# Altium PCB PCB1.PcbDoc
Units mm, origin at the board's own origin, x right, y up, seen from the top; angles counter-clockwise.
Board outline 90 x 79 mm, 2 copper layers (Top Layer, Bottom Layer); 37 components, 0 nets, 114 pads, 0 vias.
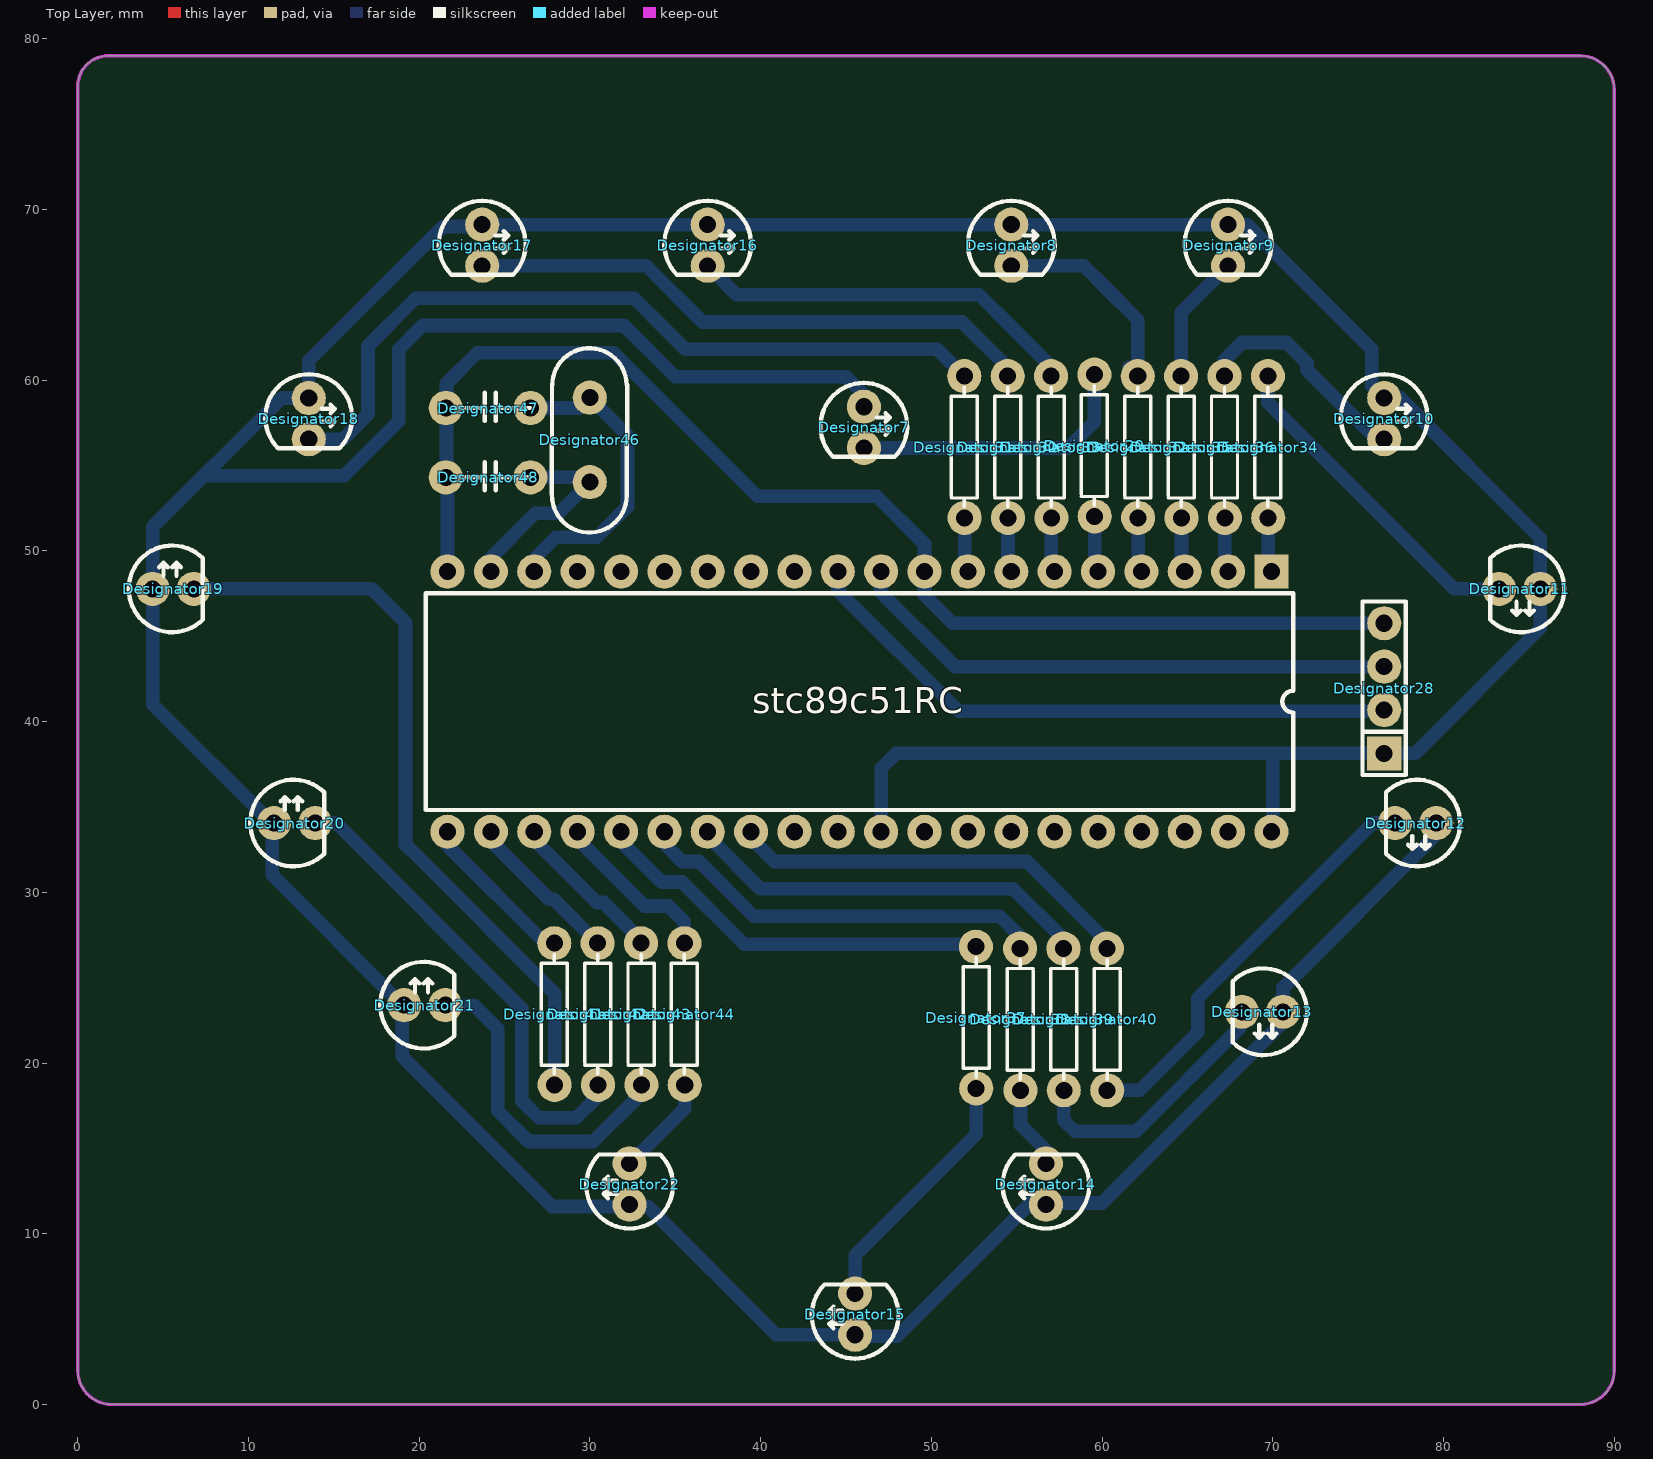
[diagram p0: Top Layer view]
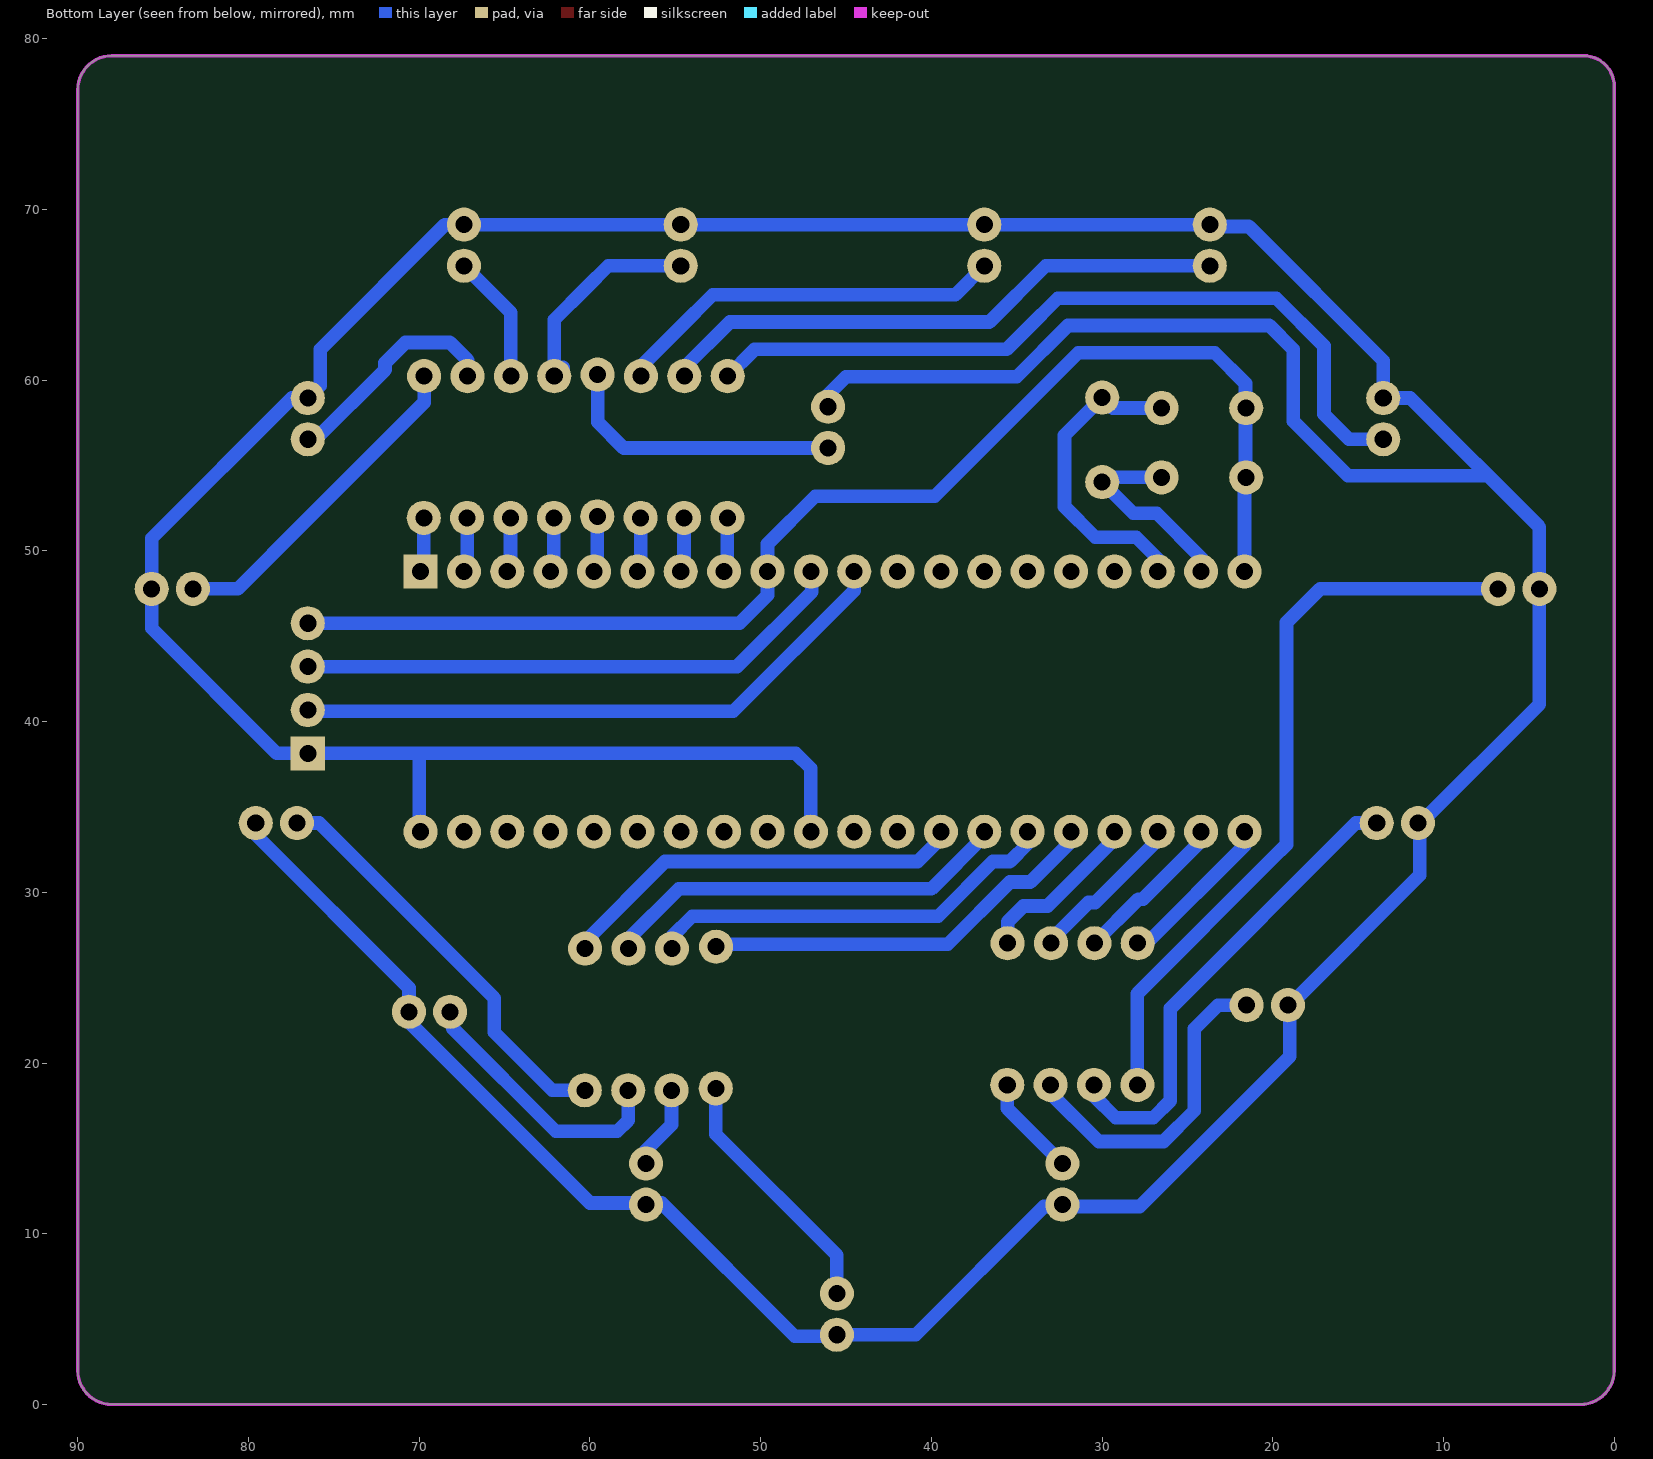
[diagram p1: Bottom Layer view, seen from below]

## Layer stack, top to bottom
Top Solder: solder mask 0.0102, Solder Resist, Dk 3.5
Top Layer: signal copper 0.0356
Dielectric1: dielectric 0.32, FR-4, Dk 4.8
Bottom Layer: signal copper 0.0356
Bottom Solder: solder mask 0.0102, Solder Resist, Dk 3.5

## Board outline
0,2 ccw(c2,2) 2,0 88,0 ccw(c88,2) 90,2 90,77 ccw(c88,77) 88,79 1.8,79 ccw(c1.8,77.2) 0,77.2

## Design rules (kind name [scope] priority, off if disabled: settings)
Clearance [All] p1: gap=0.254 ignorepadtopadclearanceinfootprint=FALSE except(0: Arc-Hole Track-Hole SMDPad-Hole THPad-Hole Via-Hole Fill-Hole Poly-Hole Region-Hole Text-Hole)
PolygonConnect [All] p1: connectstyle=Relief reliefconductorwidth=0.254 reliefentries=4 polygonreliefangle="90 Angle" airgapwidth=0.254
RoutingVias [All] p1: holewidth=0.711 width=1.27 viastyle="Through Hole" minholewidth=0.711 minwidth=1.27 maxholewidth=0.711 maxwidth=1.27
SilkToSolderMaskClearance SilkscreenOverComponentPads [IsPad] p1: minsilkscreentomaskgap=0.254 clearancetoexposedcopper=TRUE
SolderMaskExpansion [All] p1: expansion=0.102 istentingtop=FALSE
Width [All] p1: maxlimit=0.254 minlimit=0.254 preferedwidth=0.254
29 further rules are at their usual default settings.

## Components (designator, comment, footprint, x,y, rotation, side; value= is the part's Value field where it differs from the comment)
Designator7 "Comment" LED 46.044,58.44 r270 top
Designator8 "Comment" LED 54.68,69.108 r270 top
Designator9 "Comment" LED 67.38,69.108 r270 top
Designator10 "Comment" LED 76.524,58.948 r270 top
Designator11 "Comment" LED 85.668,47.772 r180 top
Designator12 "Comment" LED 79.572,34.056 r180 top
Designator13 "Comment" LED 70.6,23 r180 top
Designator14 "Comment" LED 56.712,11.704 r90 top
Designator15 "Comment" LED 45.536,4.084 r90 top
Designator16 "Comment" LED 36.9,69.108 r270 top
Designator17 "Comment" LED 23.692,69.108 r270 top
Designator18 "Comment" LED 13.532,58.948 r270 top
Designator19 "Comment" LED 4.388,47.772 r0 top
Designator20 "Comment" LED 11.5,34.056 r0 top
Designator21 "Comment" LED 19.12,23.388 r0 top
Designator22 "Comment" LED 32.328,11.704 r90 top
Designator28 "Comment" SIP4 76.524,38.138 r90 top
Designator29 "Comment" 电阻 59.756,55.988 r90 top
Designator30 "Comment" 电阻 54.68,55.9 r90 top
Designator31 "Comment" 电阻 52.14,55.9 r90 top
Designator32 "Comment" 电阻 62.3,55.9 r90 top
Designator33 "Comment" 电阻 57.22,55.9 r90 top
Designator34 "Comment" 电阻 69.92,55.9 r90 top
Designator35 "Comment" 电阻 64.84,55.9 r90 top
Designator36 "Comment" 电阻 67.38,55.9 r90 top
Designator37 "Comment" 电阻 52.416,22.844 r270 top
Designator38 "Comment" 电阻 55.008,22.732 r270 top
Designator39 "Comment" 电阻 57.548,22.732 r270 top
Designator40 "Comment" 电阻 60.088,22.732 r270 top
Designator41 "Comment" 电阻 28.124,22.688 r90 top
Designator42 "Comment" 电阻 30.664,22.688 r90 top
Designator43 "Comment" 电阻 33.204,22.688 r90 top
Designator44 "Comment" 电阻 35.744,22.688 r90 top
Designator46 "Comment" 晶振 29.788,56.408 r90 top
Designator47 "Comment" 陶瓷电容 24.2,58.44 r0 top
Designator48 "Comment" 陶瓷电容 24.2,54.376 r0 top
stc89c51RC "Comment" dip40 69.92,48.788 r270 top

## Footprints (in the part's own frame and the unit in brackets; to place one, negate y for a bottom-side part, rotate by r counter-clockwise, add the part's x,y. Pads: shape width x height; smd on the part's side, far side on the other; paste and mask are expansions set on the pad)
dip40 [mm]
  rect 2x2 hole 1: 1(0,0)
  round 2 hole 1: 2(0,-2.54) 3(0,-5.08) 4(0,-7.62) 5(0,-10.16) 6(0,-12.7) 7(0,-15.24) 8(0,-17.78) 9(0,-20.32) 10(0,-22.86) 11(0,-25.4) 12(0,-27.94) 13(0,-30.48) 14(0,-33.02) 15(0,-35.56) 16(0,-38.1) 17(0,-40.64) 18(0,-43.18) 19(0,-45.72) 20(0,-48.26) 21(15.24,-48.26) 22(15.24,-45.72) 23(15.24,-43.18) 24(15.24,-40.64) 25(15.24,-38.1) 26(15.24,-35.56) 27(15.24,-33.02) 28(15.24,-30.48) 29(15.24,-27.94) 30(15.24,-25.4) 31(15.24,-22.86) 32(15.24,-20.32) 33(15.24,-17.78) 34(15.24,-15.24) 35(15.24,-12.7) 36(15.24,-10.16) 37(15.24,-7.62) 38(15.24,-5.08) 39(15.24,-2.54) 40(15.24,0)
  silkscreen extent 1.27,-49.53 13.97,1.27
LED [mm]
  round 2 hole 1: 1(0,0) 2(2.413,0)
  silkscreen extent -1.4,-2.54 2.94,2.54
SIP4 [mm]
  rect 2x2 hole 1: 1(0,0)
  round 2 hole 1: 2(2.54,0) 3(5.08,0) 4(7.62,0)
  silkscreen extent -1.27,-1.27 8.89,1.27
晶振 [mm]
  round 2 hole 1: 1(2.567,-0.205) 2(-2.386,-0.205)
  silkscreen extent -5.34,-2.39 5.46,2.03
电阻 [mm]
  round 2 hole 1: 1(4.33,0.21) 2(-3.97,0.19)
  silkscreen extent -3.31,-0.55 3.67,0.97
陶瓷电容 [mm]
  round 2 hole 1: 1(-2.64,-0.075) 2(2.313,-0.075)
  silkscreen extent -2,-0.84 2.31,0.81

## Nets (pads, with @x,y where several pads share a name; then routed paths per layer and width w, separated by ;. In a path a pad name is that pad's centre, name@x,y a point inside that pad or via, vN(x,y) a via of type N, cw(c..) or ccw(c..) an arc to the next point about the centre after c; other vN are vias at no path point)
pads on no net: Designator7.1 Designator7.2 Designator8.1 Designator8.2 Designator9.1 Designator9.2 Designator10.1 Designator10.2 Designator11.1 Designator11.2 Designator12.1 Designator12.2 Designator13.1 Designator13.2 Designator14.1 Designator14.2 Designator15.1 Designator15.2 Designator16.1 Designator16.2 Designator17.1 Designator17.2 Designator18.1 Designator18.2 Designator19.1 Designator19.2 Designator20.1 Designator20.2 Designator21.1 Designator21.2 Designator22.1 Designator22.2 Designator28.1 Designator28.2 Designator28.3 Designator28.4 Designator29.1 Designator29.2 Designator30.1 Designator30.2 Designator31.1 Designator31.2 Designator32.1 Designator32.2 Designator33.1 Designator33.2 Designator34.1 Designator34.2 Designator35.1 Designator35.2 Designator36.1 Designator36.2 Designator37.1 Designator37.2 Designator38.1 Designator38.2 Designator39.1 Designator39.2 Designator40.1 Designator40.2 Designator41.1 Designator41.2 Designator42.1 Designator42.2 Designator43.1 Designator43.2 Designator44.1 Designator44.2 Designator46.1 Designator46.2 Designator47.1 Designator47.2 Designator48.1 Designator48.2 stc89c51RC.1 stc89c51RC.2 stc89c51RC.3 stc89c51RC.4 stc89c51RC.5 stc89c51RC.6 stc89c51RC.7 stc89c51RC.8 stc89c51RC.9 stc89c51RC.10 stc89c51RC.11 stc89c51RC.12 stc89c51RC.13 stc89c51RC.14 stc89c51RC.15 stc89c51RC.16 stc89c51RC.17 stc89c51RC.18 stc89c51RC.19 stc89c51RC.20 stc89c51RC.21 stc89c51RC.22 stc89c51RC.23 stc89c51RC.24 stc89c51RC.25 stc89c51RC.26 stc89c51RC.27 stc89c51RC.28 stc89c51RC.29 stc89c51RC.30 stc89c51RC.31 stc89c51RC.32 stc89c51RC.33 stc89c51RC.34 stc89c51RC.35 stc89c51RC.36 stc89c51RC.37 stc89c51RC.38 stc89c51RC.39 stc89c51RC.40
copper on no net: | length 980.7
  Bottom Layer w0.8: 6.801,47.772 17.228,47.772 19.2,45.8 19.2,32.8 20,32 27.934,24.066 27.934,18.718 ; 7.441,54.4 15.6,54.4 18.8,57.6 18.8,61.8 20.2,63.2 32,63.2 35,60.2 45,60.2 46.044,59.156 46.044,58.44 ; 13.532,56.535 15.535,56.535 17,58 17,62 19.8,64.8 32.6,64.8 34.4,63 35.6,61.8 38.2,61.8 45.8,61.8 50.36,61.8 51.93,60.23 ; 13.913,34.056 15.144,34.056 26,23.2 26,17.8 27,16.8 29.2,16.8 30.474,18.074 30.474,18.718 ; 21.533,23.388 23.212,23.388 23.72,22.88 24.6,22 24.6,17.2 26.4,15.4 29.696,15.4 30.2,15.4 33.014,18.214 33.014,18.718 ; 21.6,53.917 21.6,57.473 21.6,59.8 23.4,61.6 31.4,61.6 34.36,58.64 39.8,53.2 46.8,53.2 49.6,50.4 49.6,48.788 49.6,47.4 51.242,45.758 76.524,45.758 ; 21.66,33.548 21.66,32.74 27.382,27.018 ; 21.66,48.788 21.66,53.857 ; 23.692,66.695 33.305,66.695 36.6,63.4 51.8,63.4 54.47,60.73 54.47,60.23 ; 24.2,33.548 24.2,33 27.6,29.6 27.872,29.6 30.454,27.018 ; 24.2,48.788 24.2,49.6 26.8,52.2 28.171,52.2 29.993,54.022 ; 26.513,54.301 29.714,54.301 ; 26.513,58.365 29.383,58.365 29.993,58.975 32.2,56.768 32.2,52.6 30.4,50.8 28,50.8 26.74,49.54 26.74,48.788 ; 26.74,33.548 26.74,33.06 30.4,29.4 30.8,29.4 33,27.2 ; 29.28,33.548 29.28,33.12 33.2,29.2 34.6,29.2 35.534,28.266 35.534,27.018 ; 31.82,33.548 31.82,32.98 34.2,30.6 35.4,30.6 39.038,26.962 52.458,26.962 ; 32.328,14.117 35.554,17.343 35.554,18.718 ; 34.36,33.548 34.36,32.84 35.4,31.8 36.4,31.8 39.6,28.6 54,28.6 55.198,27.402 55.198,26.702 ; 36.9,33.548 36.9,33.3 40,30.2 54.8,30.2 57.738,27.262 57.738,26.702 ; 36.9,66.695 38.595,65 52.8,65 54.75,63.05 57.01,60.79 57.01,60.23 ; 39.44,33.548 39.44,33.16 40.8,31.8 55.6,31.8 60.278,27.122 60.278,26.702 ; 44.52,48.788 44.52,47.68 51.6,40.6 76.4,40.6 ; 45.536,6.497 45.536,8.736 52.626,15.826 52.626,18.514 ; 46.044,56.027 58.027,56.027 59.546,57.546 59.546,60.318 ; 47,48.6 47,47.6 51.382,43.218 76.524,43.218 ; 47.06,33.548 47.06,37.26 47.938,38.138 70.138,38.138 78.338,38.138 85.668,45.468 85.668,50.732 77.452,58.948 76.524,58.948 75.8,59.672 75.8,61.8 68.492,69.108 54.68,69.108 23.692,69.108 23.584,69 21.4,69 13.532,61.132 13.532,58.948 11.948,58.948 4.388,51.388 4.388,50.988 4.388,47.772 4.388,41.012 11.4,34 11.4,31 19,23.4 19,20.4 27.8,11.6 29.6,11.6 33.4,11.6 40.92,4.08 45.532,4.08 45.612,4 48,4 55.8,11.8 59.4,11.8 60,11.8 70.6,22.4 70.6,23 70.6,24.4 79.6,33.4 ; 51.95,48.978 51.95,51.93 ; 54.49,48.978 54.49,51.93 ; 54.68,66.695 58.927,66.695 60.2,65.422 62.09,63.532 62.09,60.23 61.578,60.742 ; 55.218,18.402 55.218,16.382 56.712,14.888 56.712,14.117 ; 57.03,48.978 57.03,51.93 ; 57.758,18.402 57.758,16.642 58.4,16 62,16 68.015,22.015 68.015,22.88 ; 59.566,48.982 59.566,52.018 ; 60.298,18.402 62.202,18.402 65.6,21.8 65.6,23.8 75.856,34.056 77.159,34.056 ; 62.11,48.978 62.11,51.93 ; 64.63,60.23 64.63,63.945 67.38,66.695 ; 64.65,48.978 64.65,51.93 ; 67.17,60.23 67.17,61.17 68.2,62.2 70.8,62.2 72,61 72,60.6 76.065,56.535 76.524,56.535 ; 67.19,48.978 67.19,51.93 ; 69.71,60.23 69.71,58.69 76.628,51.772 80.628,47.772 83.255,47.772 ; 69.73,48.978 69.73,51.93 ; 70,33 70,38

## Keep-outs
Keep-Out Layer:
  the board outline again, w0.2